# EAGLE board BPW5008-Infrared2 (EAGLE 5.06)
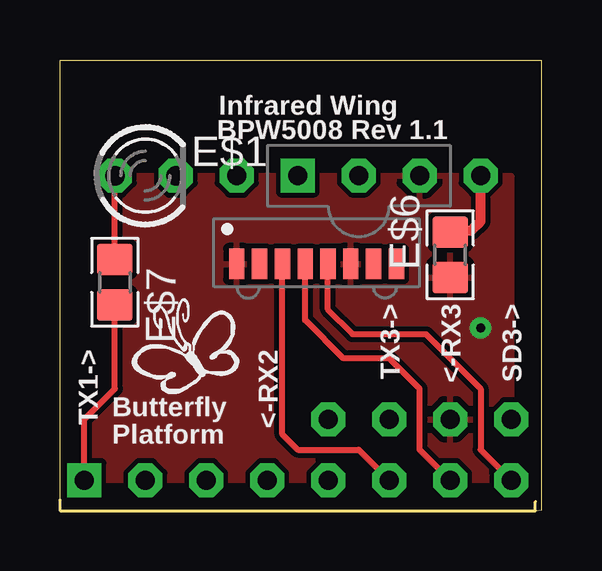
[diagram p0: board, top side]
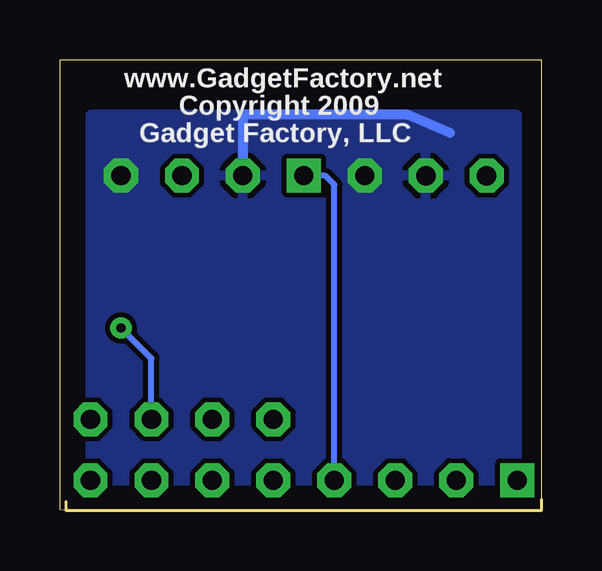
[diagram p1: board, bottom side, seen from below]

Size 20.07 x 18.8 mm. Coordinates in mm from the lower left corner, seen from the top.
Outline: 0,0 19.81,0 20.07,0.03 20.07,18.8 0,18.8 0,0
Copper layers (1*16): Top 0.035mm / dielectric 1.5mm / Bottom 0.035mm
Design rules "SparkFun_Derived_GoldePheonix_10mil *": minimum track width 10mil, minimum drill 15mil, track to track 8mil, track to pad 8mil, pad to pad 8mil, via to via 8mil, smd to smd 8mil, copper to edge 10mil, drill to drill 8mil, minimum pad ring 12mil, minimum via ring 10mil, stop-mask expansion 4mil, vias tented up to drill 18mil, thermal gap 10mil

## Footprints (pad centres in the part's own frame; a part is rotated, then mirrored left to right if it is on the bottom)
LED3MM = drill 0.813 octagon: A -1.27,0; K 1.27,0
TSOP392 = drill 0.8 square: P$1 0,0 | drill 0.8 octagon: P$2 2.54,0; P$3 5.08,0
WING_8BIT = drill 0.8 octagon: 2V5@2 16.51,3.81; 3V3@2 13.97,3.81; 5V@2 11.43,3.81; B2 3.81,1.27; B3 6.35,1.27; B4 8.89,1.27; B5 11.43,1.27; B6 13.97,1.27; B7 16.51,1.27; B8 19.05,1.27; GND@2 19.05,3.81 | drill 0.8 square: B1 1.27,1.27
TFDU6300 = smd 0.635 x 1.27: P$1 0,0; P$2 0.95,0; P$3 1.9,0; P$4 2.85,0; P$5 3.8,0; P$6 4.75,0; P$7 5.7,0; P$8 6.65,0
C0805 = smd 1.3 x 1.5: 1 -0.95,0; 2 0.95,0
R0805 = smd 1.3 x 1.5: 1 -0.95,0; 2 0.95,0

## Placement (x,y rotation side)
E$1  [LED3MM]  3.56,13.97 0 top
E$2  [TSOP392]  9.91,13.97 0 top
E$3  [WING_8BIT]  -0.25,0 0 top
E$4  [TFDU6300]  7.37,10.29 0 top
E$6  [C0805]  16.26,10.67 90 top
E$7  [R0805]  2.29,9.53 270 top

## Library data of the parts
E$1 = led
E$2 E$4 = GadgetFactory
E$3 = GadgetFactory_Pub
E$6 E$7 = GadgetFactory_Pub-new

## Nets
2V5: E$2.P$3 E$3.2V5@2 E$4.P$1 E$4.P$6 E$6.1
3V3: E$3.3V3@2
GND: E$1.K E$2.P$2 E$6.2
S$2: E$3.B5
S$3: E$3.B8 E$4.P$5
S$4: E$1.A E$7.1
S$12: E$3.B6 E$4.P$3
S$13: E$3.B2
S$14: E$3.B7 E$4.P$4
S$15: E$2.P$1 E$3.B4
S$16: E$3.B1 E$7.2

## Tracks (layer width: path | path; a pad name or v marks a point on that pad's centre or on a via)
2V5  (via drill 0.38)
  Bottom 0.254: v17.53,7.62 16.26,6.35 E$3.2V5@2
  pour Top: 1.02,1.27 1.02,13.97 18.8,13.97 18.8,1.27
GND  (via drill 0.8 pad 1.42)
  Top 0.406: 16.49,11.67 E$6.2 16.27,11.68 17.14,11.68 17.53,12.06 v17.53,13.97
  Bottom 0.406: 3.81,15.75 5.59,16.51 12.45,16.51 E$2.P$2
  other vias: 7.37,13.97
  pour Bottom: 1.02,1.27 1.02,16.51 18.8,16.51 18.8,1.27
S$3
  Top 0.254: E$4.P$5 11.17,8.39 12.19,7.37 15.24,7.37 17.53,5.08 17.53,2.54 E$3.B8
S$4
  Top 0.254: E$7.1 E$1.A
S$12
  Top 0.254: E$4.P$3 9.27,3.18 9.91,2.54 12.45,2.54 E$3.B6
S$14
  Top 0.254: E$4.P$4 10.22,7.95 11.81,6.35 13.72,6.35 14.99,5.08 14.99,2.54 E$3.B7
S$15
  Bottom 0.254: E$3.B4 8.64,13.59 9.02,13.97 E$2.P$1
S$16
  Top 0.254: E$3.B1 1.02,3.81 2.29,5.08 E$7.2

## Text on the board
tPlace: Infrared Wing | BPW5008 Rev 1.1 | TX3-> | <-RX3 | SD3-> | TX1-> | <-RX2 | Butterfly | Platform
bPlace: www.GadgetFactory.net | Copyright 2009 | Gadget Factory, LLC